# EAGLE board ModuleBoard_OLD (EAGLE 6.1)
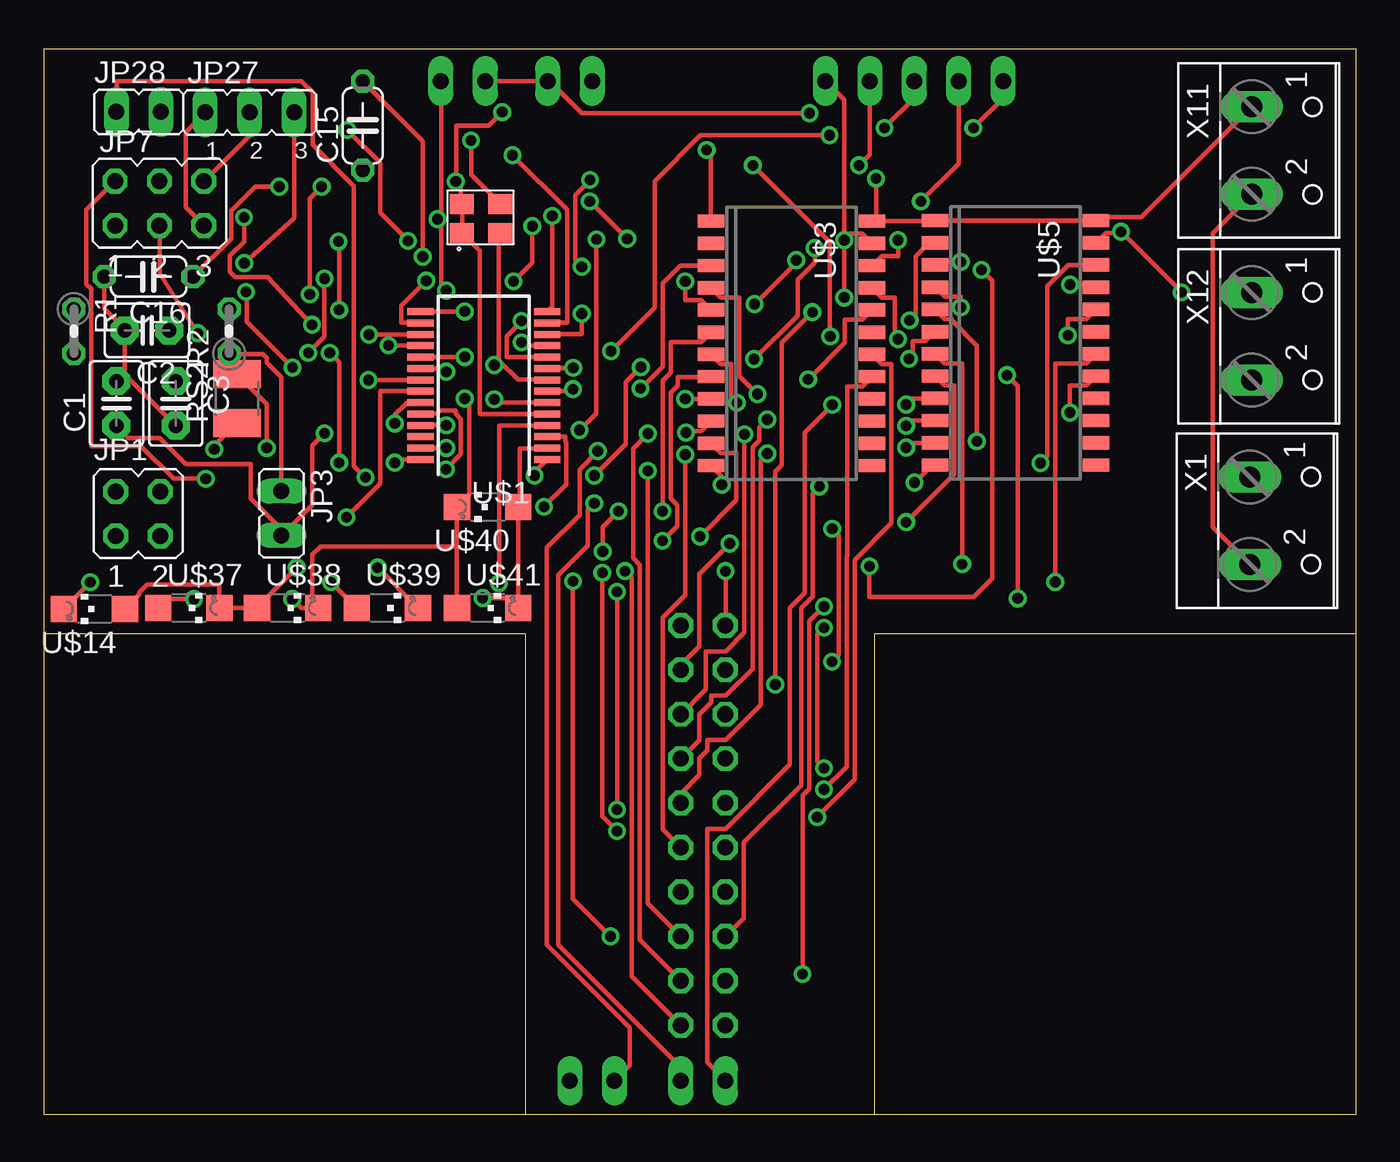
[diagram p0: board, top side]
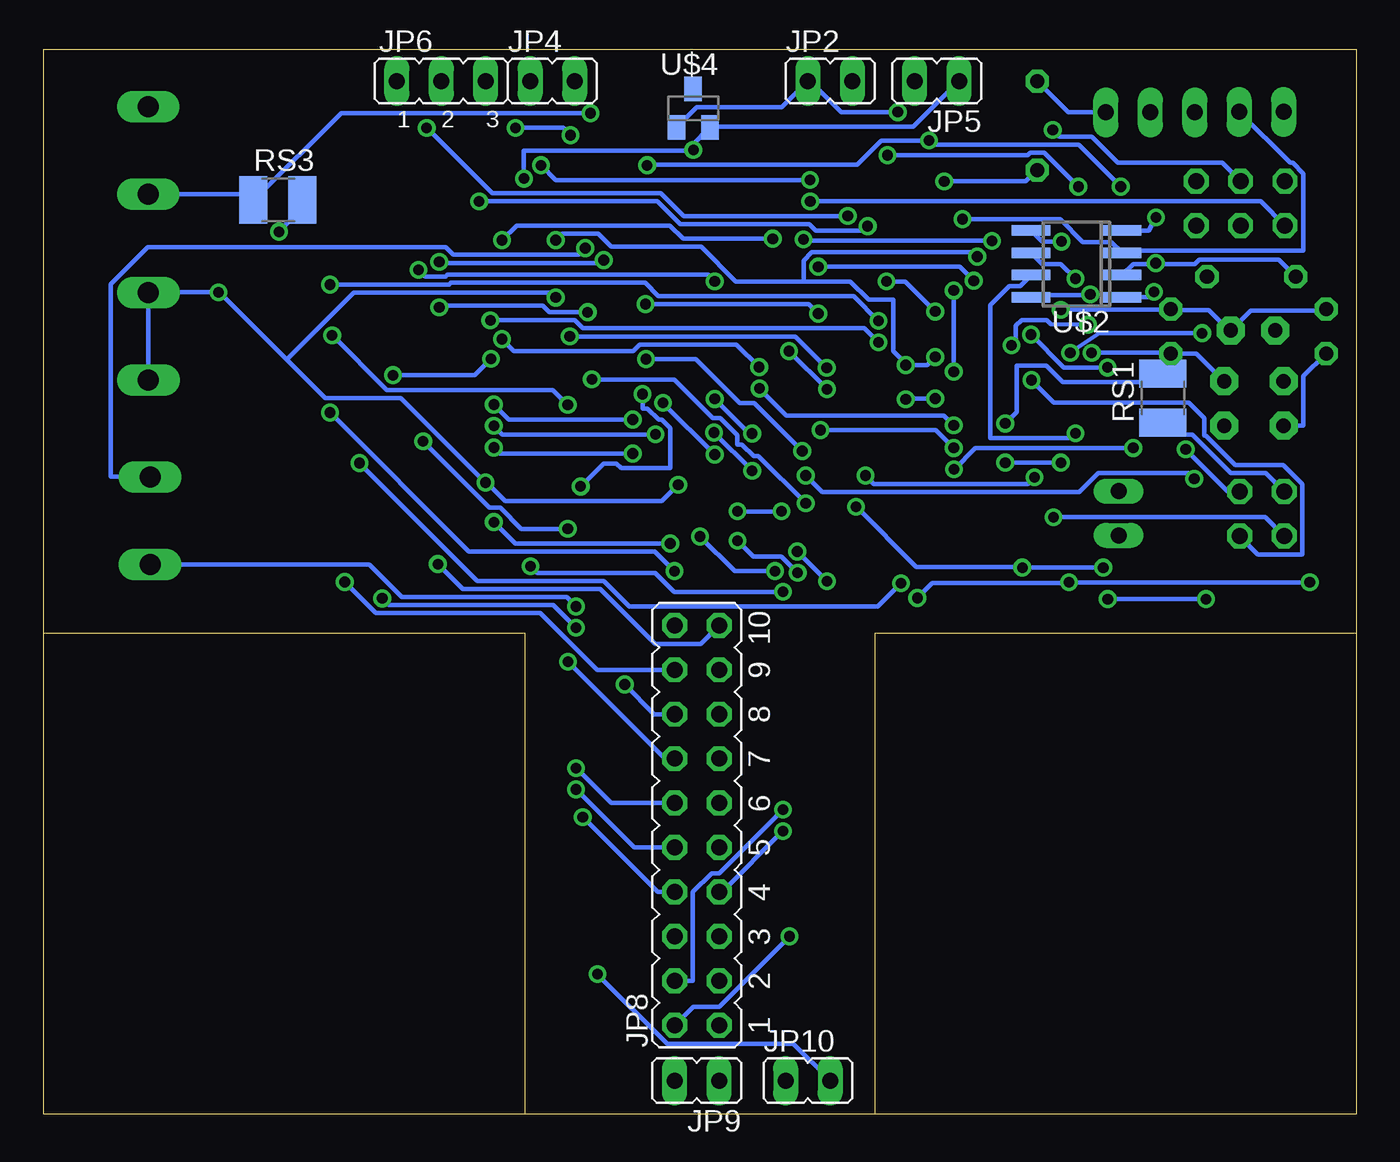
[diagram p1: board, bottom side, seen from below]

Size 75 x 60.9 mm. Coordinates in mm from the lower left corner, seen from the top.
Outline: 27.5,0 0,0 0,27.5
Outline: 27.5,0 47.5,0
Outline: 47.5,0 75,0 75,27.5
Outline: 75,27.5 75,60.9 0,60.9 0,27.5
Outline: 0,27.5 27.5,27.5 27.5,0
Outline: 47.5,0 47.5,27.5 75,27.5
Copper layers (1*16): Top 0.035mm / dielectric 1.5mm / Bottom 0.035mm
Design rules: minimum track width 10mil, minimum drill 24mil, track to track 8mil, track to pad 8mil, pad to pad 8mil, via to via 8mil, smd to smd 8mil, copper to edge 40mil, drill to drill 10mil, minimum pad ring 10mil, minimum via ring 8mil, stop-mask expansion 4mil, vias tented up to drill 0mil, thermal gap 10mil
tRestrict: area 0,0 to 27.5,27.5; area 47.5,0 to 75,27.5
bRestrict: area 0,0 to 27.5,27.5; area 47.5,0 to 75,27.5

## Footprints (pad centres in the part's own frame; a part is rotated, then mirrored left to right if it is on the bottom)
C2.5-3 = drill 0.813 pad 1.6 octagon: 1 -1.27,0; 2 1.27,0
C050-024X044 = drill 0.813 octagon: 1 -2.54,0; 2 2.54,0
JP2Q = drill 0.914 octagon: 1 -1.27,-1.27; 2 -1.27,1.27; 3 1.27,-1.27; 4 1.27,1.27
JP1 = drill 0.914 long: 1 0,-1.27; 2 0,1.27
JP2 = drill 0.914 long: 1 -2.54,0; 2 0,0; 3 2.54,0
JP3Q = drill 0.914 octagon: 1 -2.54,-1.27; 2 -2.54,1.27; 3 0,-1.27; 4 0,1.27; 5 2.54,-1.27; 6 2.54,1.27
JP10Q = drill 0.914 octagon: 1 -11.43,-1.27; 2 -11.43,1.27; 3 -8.89,-1.27; 4 -8.89,1.27; 5 -6.35,-1.27; 6 -6.35,1.27; 7 -3.81,-1.27; 8 -3.81,1.27; 9 -1.27,-1.27; 10 -1.27,1.27; 11 1.27,-1.27; 12 1.27,1.27; 13 3.81,-1.27; 14 3.81,1.27; 15 6.35,-1.27; 16 6.35,1.27; 17 8.89,-1.27; 18 8.89,1.27; 19 11.43,-1.27; 20 11.43,1.27
0204V = drill 0.813 octagon: 1 -1.27,0; 2 1.27,0
R3225 = smd 1.6 x 2.7: 1 -1.4,0; 2 1.4,0
SSOP28 = smd 0.4 x 1.5: 1 -4.225,-3.625; 2 -3.575,-3.625; 3 -2.925,-3.625; 4 -2.275,-3.625; 5 -1.625,-3.625; 6 -0.975,-3.625; 7 -0.325,-3.625; 8 0.325,-3.625; 9 0.975,-3.625; 10 1.625,-3.625; 11 2.275,-3.625; 12 2.925,-3.625; 13 3.575,-3.625; 14 4.225,-3.625; 15 4.225,3.625; 16 3.575,3.625; 17 2.925,3.625; 18 2.275,3.625; 19 1.625,3.625; 20 0.975,3.625; 21 0.325,3.625; 22 -0.325,3.625; 23 -0.975,3.625; 24 -1.625,3.625; 25 -2.275,3.625; 26 -2.925,3.625; 27 -3.575,3.625; 28 -4.225,3.625
SO-08 = smd 0.6 x 2.2: 1 -1.905,-2.6; 2 -0.635,-2.6; 3 0.635,-2.6; 4 1.905,-2.6; 5 1.905,2.6; 6 0.635,2.6; 7 -0.635,2.6; 8 -1.905,2.6
SOIC-24 = smd 0.762 x 1.524: 1 -6.985,-4.6; 2 -5.715,-4.6; 3 -4.445,-4.6; 4 -3.175,-4.6; 5 -1.905,-4.6; 6 -0.635,-4.6; 7 0.635,-4.6; 8 1.905,-4.6; 9 3.175,-4.6; 10 4.445,-4.6; 11 5.715,-4.6; 12 6.985,-4.6; 13 6.985,4.6; 14 5.715,4.6; 15 4.445,4.6; 16 3.175,4.6; 17 1.905,4.6; 18 0.635,4.6; 19 -0.635,4.6; 20 -1.905,4.6; 21 -3.175,4.6; 22 -4.445,4.6; 23 -5.715,4.6; 24 -6.985,4.6
SOT23 = smd 1 x 1.4: 1 -0.95,-1.1; 2 0.95,-1.1; 3 0,1.1
CTS632 = smd 1.397 x 1.143: 1 -2.21,-1.651; 2 0,-1.651; 3 0,0; 4 -2.21,0
CHIPLED_1206 = smd 1.5 x 1.5: A 0,-1.75; C 0,1.75
W237-102 = drill 1.194 long: 1 -2.5,-1.27; 2 2.5,-1.27

## Placement (x,y rotation side)
C1  100pF  [C2.5-3]  4.16,40.64 90 top
C2  47nF  [C2.5-3]  5.9,44.82 180 top
C3  100pF  [C2.5-3]  7.55,40.64 270 top
C15  10nF  [C050-024X044]  18.23,56.52 90 top
C16  15pF  [C050-024X044]  5.99,47.89 180 top
JP1  I2C  [JP2Q]  5.4,34.34 0 top
JP2  VREF  [JP1]  30.06,59.07 270 bottom
JP3  CAN  [JP1]  13.58,34.36 180 top
JP4  [JP1]  45.94,59.07 270 bottom
JP5  SUPPLY1  [JP1]  23.96,59.07 90 bottom
JP6  [JP2]  52.28,59.07 0 bottom
JP7  [JP3Q]  6.61,52.08 0 top
JP8  [JP10Q]  37.68,16.53 90 bottom
JP9  [JP1]  37.68,1.92 90 bottom
JP10  SUPPLY2  [JP1]  31.33,1.92 270 bottom
JP27  [JP2]  11.77,57.29 0 top
JP28  [JP1]  5.42,57.31 270 top
R1  1k3  [0204V]  1.72,44.77 270 top
R2  1k3  [0204V]  10.6,44.77 90 top
RS1  <200  [R3225]  11.05,40.95 90 bottom
RS2  <200  [R3225]  11.04,40.93 90 top
RS3  0  [R3225]  61.61,52.28 0 bottom
U$1  PIC18F23K22  [SSOP28]  25.15,41.67 90 top
U$2  TJA1040  [SO-08]  15.98,48.62 90 bottom
U$3  CD4514BM96E4  [SOIC-24]  42.74,44.08 270 top
U$4  LM4040  [SOT23]  37.89,57.51 0 bottom
U$5  CD4514BM96E4  [SOIC-24]  55.52,44.11 270 top
U$11  CTS632  [CTS632]  26.1,52.04 0 top
U$14  [CHIPLED_1206]  2.89,28.9 90 top
U$37  [CHIPLED_1206]  8.3,28.96 270 top
U$38  [CHIPLED_1206]  13.93,28.96 270 top
U$39  [CHIPLED_1206]  19.64,28.96 270 top
U$40  [CHIPLED_1206]  25.37,34.73 90 top
U$41  [CHIPLED_1206]  25.36,28.96 270 top
X1  [W237-102]  70.19,33.95 270 top
X11  [W237-102]  70.3,55.11 270 top
X12  [W237-102]  70.29,44.49 270 top

## Library data of the parts
C1-C3 = capacitor-wima
C15 C16 R1 R2 = rcl
JP1-JP10 JP27 JP28 = jumper
RS1-RS3 = resistor
U$1 U$2 U$4 = sj 9-29
U$3 U$5 = SolarJackets_BMS
U$11 = SolarJackets
U$14 U$37-U$41 = led
X1 X11 X12 = con-wago-500; MPN: 237-102; OC_FARNELL: unknown; OC_NEWARK: 70K9898

## Nets
3.3V: C15.1 JP2.1 U$1.5 U$4.1 U$11.1 U$11.4
AGND: JP2.2 JP5.2 JP10.2 RS3.1 X1.2 X11.2
CAN: U$1.13 U$2.8
GND: C1.2 C2.2 C3.2 C15.2 C16.2 JP4.2 JP27.3 RS3.2 U$1.8 U$1.19 U$2.2 U$3.12 U$3.23 U$5.12 U$5.23 U$11.2 X12.1 X12.2
N$1: U$1.3 U$14.A U$37.C U$38.A U$39.C
N$2: U$1.4 U$5.22
N$3: JP1.3 U$1.21
N$4: U$1.10 U$5.21
N$5: U$1.11 U$5.2
N$6: U$1.18 U$2.4
N$7: U$1.12 U$5.3
N$8: U$1.2 U$14.C U$39.A U$40.A U$41.C
N$9: JP6.2 U$1.15
N$10: U$1.6 U$37.A U$38.C U$40.C U$41.A
N$11: U$1.17 U$2.1
N$12: JP28.1 U$1.1
N$13: JP7.5 JP27.1
N$14: JP7.6 JP27.2
N$15: U$3.2
N$16: JP4.1 U$1.16
N$17: U$1.25 U$3.3
N$18: JP1.1 U$1.22
N$19: RS1.2 U$1.23
N$20: U$5.13
N$21: JP7.1 U$3.22
N$22: JP7.2 U$3.21
N$23: U$5.14
N$24: U$5.15
N$25: JP10.1 X1.1
N$33: U$5.16
N$36: U$5.19
N$39: U$3.19
N$42: U$3.16
N$43: U$3.15
N$44: U$3.14
N$45: C1.1 JP3.2 R1.2 U$2.7
N$46: U$3.13
N$70: RS2.2 U$1.24
N$71: C3.1 JP3.1 R2.1 U$2.6
N$75: C2.1 R1.1 R2.2 U$2.5
N$78: C16.1 U$1.9 U$11.3
N$82: JP6.3 U$1.7
N$84: JP6.1 U$1.14
PGC: JP7.4 U$1.27
PGD: JP7.3 U$1.28
RELAYA: JP9.1 U$3.20
RELAYB: JP9.2 U$5.20
SCL: JP1.4 RS2.1
SDA: JP1.2 RS1.1
V+: JP5.1 JP28.2 U$1.20 U$2.3 U$3.1 U$3.24 U$4.2 U$5.1 U$5.24 X11.1
X0A: JP8.12 U$5.6
X0B: JP8.2 U$3.6
X1A: JP8.14 U$5.5
X1B: JP8.4 U$3.5
X2A: JP8.16 U$5.4
X2B: JP8.6 U$3.4
X3A: JP8.18 U$5.18
X3B: JP8.8 U$3.18
X4A: JP8.20 U$5.17
X4B: JP8.10 U$3.17
Y0A: JP8.11 U$5.11
Y0B: JP8.1 U$3.11
Y1A: JP8.13 U$5.9
Y1B: JP8.3 U$3.9
Y2A: JP8.15 U$5.10
Y2B: JP8.5 U$3.10
Y3A: JP8.17 U$5.8
Y3B: JP8.7 U$3.8
Y4A: JP8.19 U$5.7
Y4B: JP8.9 U$3.7

## Tracks (layer width: path | path; a pad name or v marks a point on that pad's centre or on a via)
3.3V  (via drill 0.61)
  Top 0.254: U$1.5 24.9,40.04 24.9,49.38 23.98,50.3 U$11.1 U$11.4 23.84,52.16 23.84,53.04 v23.54,53.34 23.58,53.46 23.58,56.52 25.42,56.52 v26.2,57.3
  Bottom 0.254: U$4.1 37.68,57.58 32.82,57.58 JP2.1 31.2,59.06 29.44,57.3 v26.2,57.3 | v23.54,53.34 18.88,53.34 C15.1
AGND  (via drill 0.61)
  Top 0.254: JP5.2 JP2.2 28.92,59.06 30.74,57.24 v43.76,57.24 | v43.36,8.02 43.36,18.24 43.74,18.62 43.74,28.2 v44.58,29.04 | X11.2 66.8,50.38 66.8,33.58 X1.2
  Bottom 0.254: X11.2 63.34,52.6 RS3.1 62.9,52.34 58,57.24 v43.76,57.24 | v43.36,8.02 39.38,4.04 32.16,4.04 30.06,1.94 JP10.2 | v44.58,29.04 45.12,29.58 54.54,29.58 56.4,31.44 X1.2
CAN  (via drill 0.61)
  Top 0.254: v26.78,54.84 29.9,51.72 29.9,45.26 28.78,45.26 U$1.13 | v15.88,53.04 15.2,52.36 v15.2,46.88
  Bottom 0.254: v26.78,54.84 18.78,54.84 18.64,54.98 17.82,54.98 v15.88,53.04 | v15.2,46.88 15.24,46.84 18.44,46.84 18.56,46.72 U$2.8
GND  (via drill 0.61)
  Top 0.254: C3.2 4.66,42.26 C1.2 4.62,42.38 4.62,44.8 C2.2 4.6,44.94 3.46,46.08 C16.2 | v11.46,48.66 14.3,51.24 JP27.3 | 26,43.1 26,50.3 26.08,50.38 U$11.2 | 26,43.1 27.1,42 U$1.8 | v24.06,43.3 21.54,43.3 U$1.19 | 26,43.1 v25.74,42.84 | 45.74,50.34 46.78,50.34 47.32,49.8 U$3.23 | 45.74,50.34 45.74,58 44.68,59.06 JP4.2 | v38.74,36 38.74,36.48 38.14,37.08 U$3.12 | v49.76,36.12 50.76,37.12 U$5.12 | U$5.23 60.14,49.84 60.68,50.38 61.56,50.38 v61.56,50.46 v65.02,47 | v45.74,46.7 v45.74,49.98 45.74,50.34 | v21.66,49.04 21.66,55.64 C15.2
  Bottom 0.254: C15.2 16.46,57.3 JP27.3 | 11.6,48.62 9.22,48.62 8.96,48.88 4.44,48.88 C16.2 | 11.6,48.62 12.74,48.62 13.36,48 U$2.2 | v11.46,48.66 11.6,48.62 | v24.06,43.3 24.52,42.84 v25.74,42.84 25.78,42.96 26.46,43.64 26.46,46.58 27.86,46.58 28.9,47.62 31.58,47.62 | v38.74,36 39.68,35.06 48.62,35.06 49.68,36.12 v49.76,36.12 54.6,40.96 58.9,40.96 61.1,43.16 | v61.56,50.46 60.22,51.8 60.22,52.26 RS3.2 | X12.2 69.02,46.86 X12.1 v65.02,47 64.9,46.96 61.1,43.16 | v45.74,46.7 46.02,46.98 57.28,46.98 61.1,43.16 | 31.58,47.62 35.46,47.62 37.44,49.6 42.56,49.6 43.32,50.36 45.36,50.36 v45.74,49.98 | v21.66,49.04 21.92,49.3 31.1,49.3 31.58,48.82 31.58,47.62
N$1  (via drill 0.61)
  Top 0.254: U$14.A 4.66,28.92 5.46,29.72 5.46,29.84 5.92,30.3 10.04,30.3 U$37.C 10.16,28.96 12.16,28.96 U$38.A 12.26,29.06 v14.46,31.26 | v19.08,31.26 U$39.C | v28.58,34.74 29.86,36.02 29.86,38.44 29.8,38.5 29.8,38.74 U$1.3
  Bottom 0.254: v14.46,31.26 v19.08,31.26 19.2,31.3 25.14,31.3 v28.58,34.74
N$2  (via drill 0.61)
  Top 0.254: v26.02,30.36 26.02,39.38 U$1.4 | v56.96,37.24 57.34,37.62 57.34,47.34 58.54,48.54 60.12,48.54 U$5.22
  Bottom 0.254: v26.02,30.36 27.34,29.04 41.54,29.04 43,30.5 50.22,30.5 v56.96,37.24
N$3  (via drill 0.61)
  Top 0.254: v18.56,41.98 U$1.21
  Bottom 0.254: v18.56,41.98 17.28,40.7 9.56,40.7 8.68,39.82 8.68,38.82 8.6,38.82 6.9,37.12 4.16,37.12 3.08,36.04 3.08,32.02 5.62,32.02 JP1.3
N$4  (via drill 0.61)
  Top 0.254: v27.3,45.36 27.3,45.34 26.46,44.5 26.46,43.3 U$1.10 | v58.64,47.44 60.12,47.44 U$5.21
  Bottom 0.254: v27.3,45.36 28.72,46.78 39.88,46.78 40.64,47.54 51.74,47.54 51.84,47.44 v58.64,47.44
N$5  (via drill 0.61)
  Top 0.254: v27.3,44.14 27.3,43.96 28.76,43.96 U$1.11 | v49.48,45.4 49.82,45.74 49.82,49.08 50.56,49.82 U$5.2
  Bottom 0.254: v27.3,44.14 28.1,44.94 44.2,44.94 44.66,45.4 v49.48,45.4
N$6  (via drill 0.6)
  Top 0.254: v11.45,51.28 11.45,49.9 10.63,49.08 10.63,48.17 10.94,47.88 12.79,47.88 v15.32,45.15 | v19.69,43.96 21.51,43.96 U$1.18
  Bottom 0.254: U$2.4 11.85,50.53 v11.45,51.28 | v15.32,45.15 17.45,45.18 17.68,45.42 19.12,45.42 19.45,45.09 19.45,44.2 v19.69,43.96
N$7  (via drill 0.61)
  Top 0.254: v30.74,45.78 30.74,44.6 U$1.12 | v40.62,46.32 43,48.7 v43,48.84 | v52.4,48.74 50.94,48.74 50.94,48.56 U$5.3
  Bottom 0.254: v30.74,45.78 31.28,46.32 v40.62,46.32 | v43,48.84 43.16,48.68 52.34,48.68 v52.4,48.74
N$8  (via drill 0.61)
  Top 0.254: U$1.2 27.2,38.08 27.2,34.82 U$40.A 27.1,34.72 U$41.C 26.98,29.52 v25.08,29.52 | v2.66,30.42 1.16,28.92 U$14.C | v16.42,30.42 U$39.A
  Bottom 0.254: v2.66,30.42 v16.42,30.42 16.54,30.38 24.22,30.38 v25.08,29.52
N$9  (via drill 0.61)
  Top 0.254: v24.06,45.9 21.54,45.9 U$1.15 | v26.84,47.62 27.92,48.7 v27.92,50.78 | v50.12,52.2 52.28,54.36 JP6.2
  Bottom 0.254: v24.06,45.9 25.78,47.62 v26.84,47.62 | v27.92,50.78 28.18,50.52 30.88,50.52 31.26,50.9 38.64,50.9 39.94,52.2 v50.12,52.2
N$10  (via drill 0.61)
  Top 0.254: v8.58,29.46 7.06,29.46 U$37.A | v14.2,29.46 14.7,28.96 15.66,28.96 U$38.C 15.34,29.08 15.34,32 15.82,32.48 23.6,32.48 | 23.6,32.48 23.6,34.72 U$40.C 23.7,34.82 24.3,35.42 24.3,40.68 v24.06,40.92 | 23.6,32.48 U$41.A | v25.74,40.88 25.74,40.7 U$1.6
  Bottom 0.254: v14.2,29.46 v8.58,29.46 | v25.74,40.88 25.7,40.92 v24.06,40.92
N$11  (via drill 0.61)
  Top 0.254: v18.58,44.58 U$1.17 | v14.22,42.7 11.6,45.32 11.6,46.98 v11.56,47.02
  Bottom 0.254: v18.58,44.58 16.7,42.7 v14.22,42.7 | v11.56,47.02 11.86,46.72 13.36,46.72 U$2.1
N$12  (via drill 0.61)
  Top 0.254: v28.04,36.52 28.04,36.72 U$1.1 | v18.38,36.42 17.72,37.08 17.72,53.08 15.36,55.44 15.36,58.44 14.72,59.08 4.16,59.08 JP28.1
  Bottom 0.254: v28.04,36.52 27.56,36.04 18.76,36.04 v18.38,36.42
N$13
  Top 0.254: JP7.5 8.1,51.86 8.1,56.16 JP27.1
N$14
  Top 0.254: JP7.6 11.76,55.96 JP27.2
N$16  (via drill 0.61)
  Top 0.254: v21.86,47.66 20.44,46.24 20.44,45.26 21.52,45.26 U$1.16 | v30.74,48.46 30.36,48.84 30.36,52.56 v31.22,53.42 | v46.58,54.26 47.2,54.88 JP4.1
  Bottom 0.254: v21.86,47.66 22.66,48.46 v30.74,48.46 | v31.22,53.42 45.74,53.42 v46.58,54.26
N$17  (via drill 0.61)
  Top 0.254: v23,39.4 21.54,39.4 U$1.25 | v34.1,41.5 35.36,42.76 35.36,47.52 36.36,48.52 38.12,48.52 U$3.3
  Bottom 0.254: v23,39.4 23.56,39.96 32.56,39.96 v34.1,41.5
N$18  (via drill 0.61)
  Top 0.254: v17.3,34.14 19.22,36.06 19.22,41.34 U$1.22
  Bottom 0.254: v17.3,34.14 5.2,34.14 JP1.1
N$19  (via drill 0.61)
  Top 0.254: v20.06,39.5 20.06,40 20.7,40.64 20.7,40.68 U$1.23
  Bottom 0.254: v20.06,39.5 19.4,40.16 19.4,42.82 17.72,42.82 16.76,41.86 11.54,41.86 RS1.2
N$21  (via drill 0.61)
  Top 0.254: v48.82,49.98 48.82,49.08 47.88,49.08 U$3.22 | v31.2,52.2 v33.34,50.06
  Bottom 0.254: v48.82,49.98 47.98,50.82 39.22,50.82 38.46,50.06 v33.34,50.06 | v31.2,52.2 5.46,52.2 JP7.1
N$22  (via drill 0.61)
  Top 0.254: v48.82,44.32 48.64,44.5 48.64,46.7 47.88,46.7 47.34,47.24 U$3.21 | v34.12,42.72 33.26,41.86 33.26,38.32 v31.46,36.52 | v9.26,36.34 7.42,36.34 5.54,38.22 2.72,38.22 2.72,47.2 2.44,47.48 2.44,51.72 JP7.2
  Bottom 0.254: v48.82,44.32 48.14,43.64 41.32,43.64 40.94,44.02 35.42,44.02 v34.12,42.72 | v31.46,36.52 30.52,35.58 15.84,35.58 14.74,36.68 9.6,36.68 v9.26,36.34
N$25  (via drill 0.61)
  Top 0.254: v31.66,37.92 30.62,36.88 30.62,34.28 28.74,32.4 28.74,9.7 33.48,4.96 33.48,2.82 32.6,1.94 JP10.1 | v40.58,43.18 43.08,45.68 43.08,47.72 44.06,48.7 v44.06,49.52
  Bottom 0.254: v31.66,37.92 34.4,40.66 35.22,40.66 37.74,43.18 v40.58,43.18 | v44.06,49.52 44.44,49.14 51.6,49.14 52.04,49.58 69.06,49.58 71.16,47.48 71.16,36.46 68.94,36.46 X1.1
N$45  (via drill 0.61)
  Top 0.254: v16.04,38.94 15.34,38.24 15.34,34.84 13.6,33.1 JP3.2 13.68,33.34 11.82,35.2 11.82,37.18 8.12,37.18 6.62,38.68 4.84,38.68 C1.1
  Bottom 0.254: R1.2 1.74,43.48 3.02,42.2 3.02,39.38 4.14,39.38 C1.1 | v16.04,38.94 16.32,38.66 20.9,38.66 20.9,46.28 19.82,47.36 19.2,47.36 U$2.7
N$70  (via drill 0.61)
  Top 0.254: v22.98,36.88 23.84,37.74 23.84,39.76 23.54,40.06 23.54,40.24 22.64,40.24 22.46,40.06 21.54,40.06 U$1.24 | v12.74,38.1 12.74,40.62 RS2.2
  Bottom 0.254: v22.98,36.88 21.76,38.1 v12.74,38.1
N$71  (via drill 0.61)
  Top 0.254: v16.04,47.78 16.04,44.46 v15.12,43.54 | JP3.1 13.58,42.14 12.74,42.98 12.74,43.26 12.52,43.48 10.6,43.48 R2.1
  Bottom 0.254: v16.04,47.78 16.88,48.62 17.94,48.62 18.56,49.24 U$2.6 | v15.12,43.54 10.64,43.54 R2.1 10.48,43.5 9.14,43.5 C3.1
N$75  (via drill 0.61)
  Top 0.254: v16.84,49.9 16.88,49.86 v16.88,46
  Bottom 0.254: R1.1 1.74,46.02 1.8,45.96 6.02,45.96 C2.1 7.3,44.86 8.42,45.98 10.48,45.98 R2.2 10.6,46.02 16.86,46.02 v16.88,46 | v16.84,49.9 17.94,49.9 18.56,50.52 U$2.5
N$78  (via drill 0.61)
  Top 0.254: v24.42,55.68 24.42,53.72 26.08,52.06 U$11.3 | v30.26,42.68 30.26,42.66 28.78,42.66 U$1.9 | v44.94,44.48 44.9,44.52 44.9,49.88 v40.52,54.26 | v13.46,53.04 12.09,53.04 10.7,51.65 10.7,50.06 C16.1 | C16.1 8.53,47.88 C16.1 | C16.1
  Bottom 0.254: v13.46,53.04 15.86,55.44 24.18,55.44 v24.42,55.68 27.14,55.68 28.52,54.3 40.48,54.3 v40.52,54.26 | v30.26,42.68 32.06,44.48 v44.94,44.48
N$82  (via drill 0.61)
  Top 0.254: v30.24,41.46 30.24,41.36 28.78,41.36 U$1.7 | v32.42,43.64 34.9,46.12 34.9,53.36 37.52,55.98 v44.9,55.98 | v48.04,56.4 49.74,58.1 JP6.3
  Bottom 0.254: v32.42,43.64 v30.24,41.46 | v44.9,55.98 45.32,56.4 v48.04,56.4
N$84  (via drill 0.61)
  Top 0.254: v29.06,51.36 29.06,46.18 U$1.14 | v53.12,56.4 54.82,58.1 JP6.1
  Bottom 0.254: v29.06,51.36 38.44,51.36 39.74,52.66 49.38,52.66 v53.12,56.4
PGC  (via drill 0.61)
  Top 0.254: v23,38.1 21.54,38.1 U$1.27 | v30.62,39.12 31.58,40.08 v31.58,50.02 | v20.82,49.94 19.22,51.54 19.22,54.4 v17.34,56.28
  Bottom 0.254: v23,38.1 24.02,39.12 v30.62,39.12 | v31.58,50.02 31.5,49.94 v20.82,49.94 | v17.34,56.28 16.96,55.9 15.12,55.9 13.62,54.4 7.66,54.4 JP7.4
PGD  (via drill 0.61)
  Top 0.254: v20.06,37.26 20.06,37.44 U$1.28 | v16.88,37.26 16.88,43 v16.34,43.54 | v8.81,44.66 6.62,48.06 JP7.3
  Bottom 0.254: v16.88,37.26 v20.06,37.26 | v16.34,43.54 14.69,44.66 v8.81,44.66
RELAYA  (via drill 0.61)
  Top 0.254: v43.68,42.02 45.78,44.12 45.78,45.44 46.78,45.44 47.32,45.98 U$3.20 | v31.46,34.94 31.08,34.56 31.08,32.52 29.4,30.84 29.4,9.7 36.4,2.7 36.4,1.94 JP9.1
  Bottom 0.254: v43.68,42.02 38.98,42.02 36.78,39.82 36.34,39.82 35.36,38.84 35.36,38.3 35.1,38.3 34.44,37.64 34.16,37.64 v31.46,34.94
RELAYB  (via drill 0.61)
  Top 0.254: v58.52,44.54 58.52,45.46 59.58,45.46 60.12,46 U$5.20 | v45.06,40.56 43.48,38.98 43.48,29.8 42.64,28.96 42.64,20 38.96,16.32 37.9,16.32 37.9,2.98 38.94,1.94 JP9.2
  Bottom 0.254: v58.52,44.54 55.4,41.42 45.92,41.42 v45.06,40.56
SCL  (via drill 0.61)
  Top 0.254: v9.74,38.02 9.74,38.24 11.02,39.52 RS2.1
  Bottom 0.254: v9.74,38.02 7.34,35.62 JP1.4
SDA
  Bottom 0.254: RS1.1 10.36,38.86 9.38,38.86 7.18,36.66 5.18,36.66 JP1.2
V+  (via drill 0.61)
  Top 0.254: X11.1 62.72,51.3 60.2,51.3 60.2,51.2 U$5.24 51.04,51.1 U$5.1 50.92,51.08 U$3.24 47.56,51.2 v47.56,53.5 | v37.88,55.14 38.12,54.9 38.12,51.08 U$3.1 | v23,42.46 23,42.64 21.54,42.64 U$1.20 | v23,47.1 22.7,47.4 22.7,51.18 | 22.7,51.18 JP5.1 | v22.5,51.18 22.7,51.18
  Bottom 0.254: v23,47.1 v23,42.46 | v22.5,51.18 16.92,51.18 15.62,49.88 14,49.88 U$2.3 13.32,49.38 3.02,49.38 3.02,53.78 3.64,54.4 3.78,54.4 JP28.2 | JP5.1 25.3,56.46 36.8,56.46 36.82,56.44 U$4.2 36.96,56.4 37.88,55.48 v37.88,55.14 38,55.1 47.56,55.1 v47.56,53.5
X0A  (via drill 0.61)
  Top 0.254: v49.44,43.2 49.66,43.42 49.66,44.2 50.38,44.2 U$5.6 | v55.04,42.26 55.66,41.64 v55.66,29.5 | v44.58,27.82 44.2,27.44 44.2,20.18 v44.58,19.8
  Bottom 0.254: v49.44,43.2 50.38,42.26 v55.04,42.26 | v55.66,29.5 55.28,29.12 45.88,29.12 v44.58,27.82 | v44.58,19.8 42.58,17.8 JP8.12
X0B  (via drill 0.61)
  Top 0.254: v35.36,34.48 35.36,41.94 35.82,42.4 35.82,44.16 37.58,44.16 38.12,44.7 U$3.6 | v32.84,34.48 31.94,33.58 v31.94,32.18 | v30.24,30.48 30.24,12.32 v32.38,10.18
  Bottom 0.254: v32.84,34.48 v35.36,34.48 | v30.24,30.48 v31.94,32.18 | v32.38,10.18 36.4,6.16 37.88,6.16 JP8.2
X1A  (via drill 0.61)
  Top 0.254: v53.32,38.48 53.32,43.96 51.88,45.4 51.88,45.46 51.48,45.46 50.94,46 U$5.5 | v45.06,33.48 45.42,33.12 45.42,26.26 v45.04,25.88
  Bottom 0.254: v53.32,38.48 49.54,34.7 48.92,34.7 47.7,33.48 v45.06,33.48 | v45.04,25.88 39.5,20.34 JP8.14
X1B  (via drill 0.61)
  Top 0.254: v36.66,47.62 36.66,46.54 37.58,46.54 38.12,46 U$3.5 | v53.58,48.28 54.2,47.66 54.2,30.64 53.14,29.58 47.18,29.58 v47.18,31.34 | v32.76,17.42 v32.76,29.88
  Bottom 0.254: v36.66,47.62 37.04,48 51.94,48 52.04,47.9 53.2,47.9 v53.58,48.28 | v47.18,31.34 46.8,30.96 40.06,30.96 38.98,29.88 v32.76,29.88 | v32.76,17.42 36.4,13.78 36.84,13.78 37.9,12.72 37.9,7.64 JP8.4
X2A  (via drill 0.61)
  Top 0.254: v52.4,46.14 52.4,46.74 51.48,46.74 50.94,47.28 U$5.4 | v43.92,45.86 42.18,44.12 42.18,37.12 41.8,36.74 v41.8,24.58
  Bottom 0.254: v52.4,46.14 52.3,46.24 46.48,46.24 46.1,45.86 v43.92,45.86 | v41.8,24.58 40.1,22.88 JP8.16
X2B  (via drill 0.61)
  Top 0.254: v40.78,41.18 39.74,42.22 39.74,46.7 38.68,46.7 38.14,47.24 U$3.4 | v44.32,35.9 43.94,35.52 43.94,29.6 43.28,28.94 43.28,18.82 40,15.54 40,11.22 JP8.6
  Bottom 0.254: v40.78,41.18 40.78,40.36 40.5,40.36 39.86,39.72 39.68,39.72 39.2,39.24 39.2,36.94 42,36.94 42.28,37.22 43,37.22 v44.32,35.9
X3A  (via drill 0.61)
  Top 0.254: v57.8,30.44 57.8,42.92 59.58,42.92 60.12,43.46 U$5.18
  Bottom 0.254: v57.8,30.44 56.02,28.66 46.62,28.66 43.38,25.42 JP8.18
X3B  (via drill 0.61)
  Top 0.254: v44.2,17 46.34,19.14 46.34,31.7 48.44,33.8 48.44,42.9 47.88,42.9 U$3.18
  Bottom 0.254: v44.2,17 39.92,12.72 JP8.8
X4A  (via drill 0.61)
  Top 0.254: v58.64,40.12 58.64,41.66 59.58,41.66 U$5.17 | v38.96,31.06 JP8.20
  Bottom 0.254: v58.64,40.12 50.7,32.18 40.08,32.18 v38.96,31.06
X4B  (via drill 0.61)
  Top 0.254: v44.58,18.58 45.88,19.88 45.88,31.9 45.9,31.92 45.9,41.62 46.78,41.62 47.32,42.16 U$3.17
  Bottom 0.254: v44.58,18.58 41.26,15.26 JP8.10
Y0A  (via drill 0.61)
  Top 0.254: v49.28,38.12 49.28,38.38 50.92,38.38 U$5.11 | v41.34,37.78 40.96,37.4 40.96,23.4 38.96,21.4 37.92,21.4 37.92,20.8 37.46,20.34 37.46,19.4 36.42,18.36 JP8.11
  Bottom 0.254: v49.28,38.12 48.94,37.78 v41.34,37.78
Y0B  (via drill 0.61)
  Top 0.254: v37.5,33.04 39.58,35.12 39.58,37.82 38.68,37.82 U$3.11 | v33.22,31.06 33.6,30.68 33.6,7.9 JP8.1
  Bottom 0.254: v37.5,33.04 35.52,31.06 v33.22,31.06
Y1A  (via drill 0.61)
  Top 0.254: v49.28,40.58 49.28,40.92 50.92,40.92 U$5.9 | v41.34,39.72 40.88,39.26 40.88,38.52 40.5,38.14 40.5,25.48 38.96,23.94 38.14,23.94 38.14,23.56 37.46,22.88 37.46,21.38 JP8.13
  Bottom 0.254: v49.28,40.58 48.42,39.72 v41.34,39.72
Y1B  (via drill 0.61)
  Top 0.254: v36.66,40.9 38.12,40.9 U$3.9 | v34.52,38.92 33.68,38.08 33.68,31.8 34.06,31.42 34.06,9.98 JP8.3
  Bottom 0.254: v36.66,40.9 34.68,38.92 v34.52,38.92
Y2A  (via drill 0.61)
  Top 0.254: v49.28,39.36 49.28,39.66 U$5.10 | v40.04,38.88 40.04,27.56 38.96,26.48 37.84,26.48 37.84,24.3 JP8.15
  Bottom 0.254: v49.28,39.36 48.8,38.88 v40.04,38.88
Y2B  (via drill 0.61)
  Top 0.254: v36.7,38.98 36.7,39.08 37.58,39.08 38.12,39.62 U$3.10 | v34.52,36.8 34.52,12.06 JP8.5
  Bottom 0.254: v34.52,36.8 v36.7,38.98
Y3A  (via drill 0.61)
  Top 0.254: v49.28,33.86 52.02,36.6 52.02,41.66 51.48,41.66 50.94,42.2 U$5.8 | v39.2,32.64 37.46,30.9 37.46,26.76 36.42,25.72 JP8.17
  Bottom 0.254: v49.28,33.86 48.06,32.64 v39.2,32.64
Y3B  (via drill 0.61)
  Top 0.254: v35.36,32.8 36.2,33.64 36.2,34.84 35.82,35.22 35.82,41.26 36.24,41.68 36.24,42.16 38.12,42.16 U$3.8 | v31.92,30.96 31.92,17.04 v32.76,16.2
  Bottom 0.254: v35.36,32.8 34.46,31.9 32.86,31.9 v31.92,30.96 | v32.76,16.2 36.24,12.72 JP8.7
Y4A  (via drill 0.61)
  Top 0.254: v52.48,31.46 52.48,42.92 51.48,42.92 50.94,43.46 U$5.7
  Bottom 0.254: v52.48,31.46 51.06,30.04 43.2,30.04 40.06,26.9 37.46,26.9 36.42,27.94 JP8.19
Y4B  (via drill 0.61)
  Top 0.254: v39.62,40.68 39.28,41.02 39.28,42.9 38.68,42.9 U$3.7 | v36.66,37.72 36.66,29.7 35.36,28.4 35.36,16.3 JP8.9
  Bottom 0.254: v36.66,37.72 v39.62,40.68